# Altium PCB KANE_403.PcbDoc
Units mil, origin at the board's own origin, x right, y up, seen from the top; angles counter-clockwise.
Board outline 2490 x 5325 mil, 4 copper layers (Top Copper, Signal Layer 1, Signal Layer 2, Bottom Copper), stack 61.811 mil thick; 12 components, 57 nets, 142 pads, 0 vias.
Unrouted connection lines stored in the file: 78.
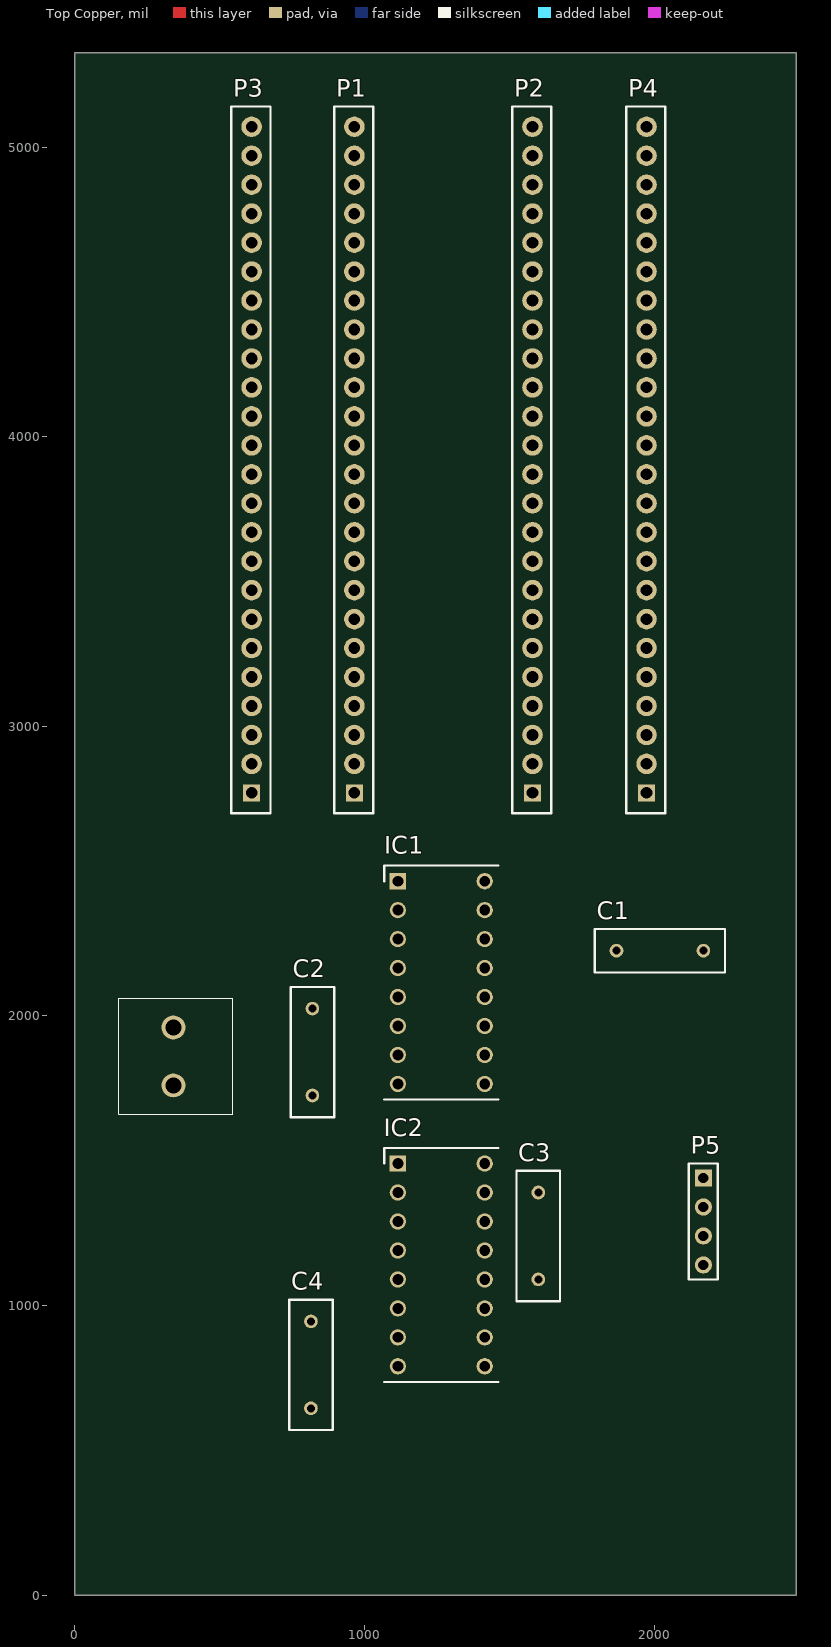
[diagram p0: Top Copper view]
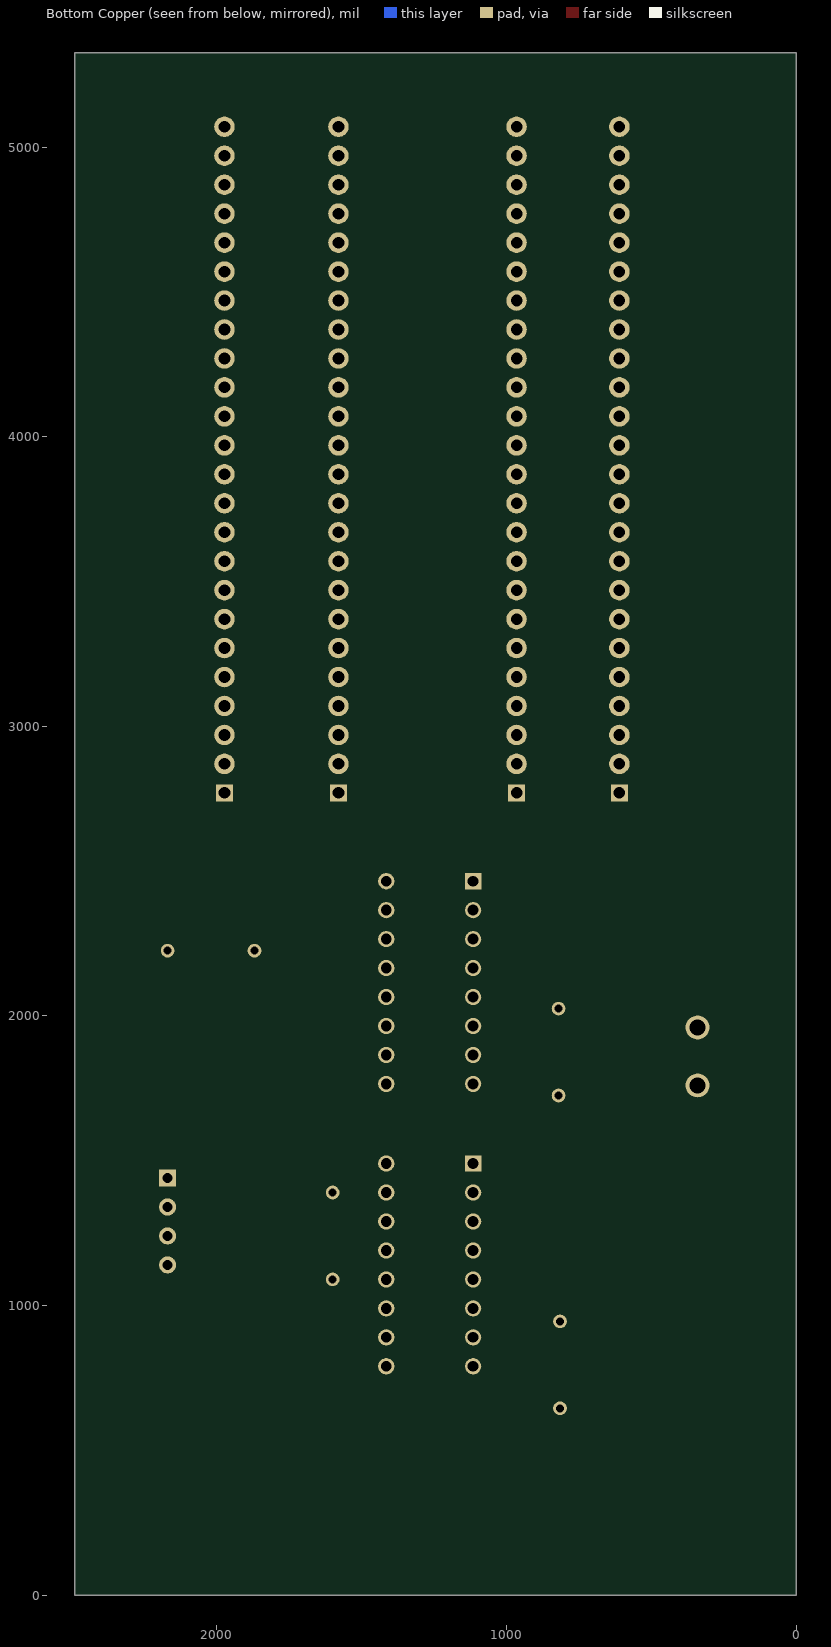
[diagram p1: Bottom Copper view, seen from below]

## Layer stack, top to bottom
Top Mask: solder mask 0.5906, Solder Resist, Dk 3.8
Top Copper: signal copper 1.378
Dielectric 1: prepreg 7.874, 7628, Dk 4.6
Signal Layer 1: signal copper 0.689
Core: core 41.9291, FR-4, Dk 4.5
Signal Layer 2: signal copper 0.689
Dielectric 2: prepreg 7.874, 7628, Dk 4.6
Bottom Copper: signal copper 1.378
Bottom Mask: solder mask 0.5906, Solder Resist, Dk 3.8

## Board outline
0,0 0,5325 2490,5325 2490,0

## Design rules (kind name [scope] priority, off if disabled: settings)
BoardOutlineClearance [All] p1: gap=7.87 ignorepadtopadclearanceinfootprint=FALSE except(15.75: Arc-SplitBarrior Arc-SplitContinuation Track-SplitBarrior Track-SplitContinuation SMDPad-SplitBarrior SMDPad-SplitContinuation THPad-SplitBarrior THPad-SplitContinuation Via-SplitBarrior Via-SplitContinuation Fill-SplitBarrior Fill-SplitContinuation Poly-SplitBarrior Poly-SplitContinuation Region-SplitBarrior Region-SplitContinuation Text-SplitBarrior Text-SplitContinuation)
Clearance "Clearance Bottom Layer" [OnLayer('Bottom Layer')] p1: gap=8 ignorepadtopadclearanceinfootprint=TRUE except(10: Arc-Text Track-Text SMDPad-Text THPad-Text Via-Text Fill-Text Poly-Text Region-Text Text-Text)
Clearance "Clearance Top Layer" [OnLayer('Top Layer')] p2: gap=8 ignorepadtopadclearanceinfootprint=TRUE except(10: Arc-Text Track-Text SMDPad-Text THPad-Text Via-Text Fill-Text Poly-Text Region-Text Text-Text)
Clearance [All] p3: gap=7.87 ignorepadtopadclearanceinfootprint=FALSE except(3.5: Arc-Arc Arc-Track Arc-SMDPad Track-Track Track-SMDPad SMDPad-SMDPad; 5: Arc-Via Track-Via SMDPad-Via THPad-Via Via-Via; 10: Arc-Text Track-Text SMDPad-Text THPad-Text Via-Text Fill-Text Poly-Text Region-Text Text-Text)
HoleSize [All] p1: absolutevalues=TRUE maxlimit=248.03 minlimit=7.87 maxpercent=80.000 minpercent=20.000
MinimumAnnularRing [All] p1: minimumring=3
MinimumSolderMaskSliver [All] p1: minsoldermaskwidth=3.94
PolygonConnect PolygonConnect_1 [All] p1: thpad.connectstyle=Relief thpad.reliefconductorwidth=20 thpad.reliefentries=4 thpad.polygonreliefangle="90 Angle" thpad.airgapwidth=10 smdpad.connectstyle=Relief smdpad.reliefconductorwidth=20 smdpad.reliefentries=4 smdpad.polygonreliefangle="90 Angle" smdpad.airgapwidth=10 via.connectstyle=Direct via.reliefconductorwidth=20 via.reliefentries=4 via.polygonreliefangle="90 Angle" via.airgapwidth=10
RoutingCorners [All] p1: cornerstyle=Round minsetback=100 maxsetback=100
RoutingVias [All] p1: holewidth=19.68 width=39.37 viastyle="Through Hole" minholewidth=7.87 minwidth=17.72 maxholewidth=39.37 maxwidth=78.74
SilkToSilkClearance [All] p1: silktosilkclearance=3.94
SilkToSolderMaskClearance [IsPad] p1: minsilkscreentomaskgap=3.94 clearancetoexposedcopper=TRUE
SolderMaskExpansion [All] p1: expansion=4 istentingtop=FALSE
Width [All] p1: maxlimit=100 minlimit=3.5 preferedwidth=15
25 further rules are at their usual default settings.

## Components (designator, comment, footprint, x,y, rotation, side; value= is the part's Value field where it differs from the comment)
C1 "Cap" RAD-0.3 2020,2225 r180 top value=100pF
C2 "Cap" RAD-0.3 820,1875 r90 top value=100pF
C3 "Cap" RAD-0.3 1600,1240 r90 top value=100pF
C4 "Cap" RAD-0.3 815,795 r90 top value=100pF
IC1 "1-2199298-4" DIPS762W70P254L2032H510Q16N 1115,2465 r0 top
IC2 "1-2199298-4" DIPS762W70P254L2032H510Q16N 1115,1490 r0 top
J1 "39544-3002" 395443002 340,1960 r270 top
P1 "Teensy41_Left_Header" HDR1X24 965,2770 r90 top
P2 "Teensy41_Right_Header" HDR1X24 1580,2770 r90 top
P3 "22-28-4242" 22-28-4242 610,2770 r90 top
P4 "22-28-4242" 22-28-4242 1973.7,2770 r90 top
P5 "Header 4" HDR1X4 2170,1440 r270 top

## Footprints (in the part's own frame and the unit in brackets; to place one, negate y for a bottom-side part, rotate by r counter-clockwise, add the part's x,y. Pads: shape width x height; smd on the part's side, far side on the other; paste and mask are expansions set on the pad)
22-28-4242 [mm] "Connector; Male Pin Header; 24 Position; Molex 22-28-4242"
  rect 1.5x1.5 hole 1.02: 1(0,0)
  round 1.8 hole 1.02: 2(2.54,0) 3(5.08,0) 4(7.62,0) 5(10.16,0) 6(12.7,0) 7(15.24,0) 8(17.78,0) 9(20.32,0) 10(22.86,0) 11(25.4,0) 12(27.94,0) 13(30.48,0) 14(33.02,0) 15(35.56,0) 16(38.1,0) 17(40.64,0) 18(43.18,0) 19(45.72,0) 20(48.26,0) 21(50.8,0) 22(53.34,0) 23(55.88,0) 24(58.42,0)
  silkscreen extent -1.78,-1.65 60.2,1.78, body extent -1.27,-1.22 59.69,1.27, height 9.78
395443002 [mm] "Molex 395443002"
  round 2.1 hole 1.4: 1(0,0) 2(5.08,0)
  silkscreen extent -2.54,-4.8 7.62,5.2, body extent -2.54,-4.8 7.62,5.2, height 14.5
DIPS762W70P254L2032H510Q16N [mm]
  rect 1.425x1.425 hole 0.95: 1(0,0)
  round 1.425 hole 0.95: 2(0,-2.54) 3(0,-5.08) 4(0,-7.62) 5(0,-10.16) 6(0,-12.7) 7(0,-15.24) 8(0,-17.78) 9(7.62,-17.78) 10(7.62,-15.24) 11(7.62,-12.7) 12(7.62,-10.16) 13(7.62,-7.62) 14(7.62,-5.08) 15(7.62,-2.54) 16(7.62,0)
  silkscreen extent -1.19,-19.15 8.81,1.37, body extent -1.19,-19.05 8.81,1.27, height 2.26
HDR1X4 [mm] "Connector; Header; 4 Position"
  rect 1.5x1.5 hole 0.9: 1(0,0)
  round 1.5 hole 0.9: 2(2.54,0) 3(5.08,0) 4(7.62,0)
  silkscreen extent -1.27,-1.27 8.89,1.27
HDR1X24 [mm] "Connector; Header; 24 Position"
  rect 1.5x1.5 hole 1.02: 1(0,0)
  round 1.8 hole 1.02: 2(2.54,0) 3(5.08,0) 4(7.62,0) 5(10.16,0) 6(12.7,0) 7(15.24,0) 8(17.78,0) 9(20.32,0) 10(22.86,0) 11(25.4,0) 12(27.94,0) 13(30.48,0) 14(33.02,0) 15(35.56,0) 16(38.1,0) 17(40.64,0) 18(43.18,0) 19(45.72,0) 20(48.26,0) 21(50.8,0) 22(53.34,0) 23(55.88,0) 24(58.42,0)
  silkscreen extent -1.78,-1.65 60.2,1.78, body extent -1.27,-1.25 59.69,1.25, height 8.26
RAD-0.3 [mm] "Radial Cap, Thru-Hole; 2 Leads; 0.3 in Pin Spacing"
  round 1.2 hole 0.7: 1(-3.81,0) 2(3.81,0)
  silkscreen extent -5.71,-1.91 5.71,1.91

## Part data
C1 C2 C3 C4: "Capacitor", LatestRevisionDate=17-Jul-2002, LatestRevisionNote="Re-released for DXP Platform.", PackageDescription="Radial Cap, Thru-Hole; 2 Leads; 0.3 in Pin Spacing", PackageReference=RAD-0.3, Published=8-Jun-2000, Publisher="Altium Limited"
IC1 IC2: "Integrated Circuit", Manufacturer_Name="TE Connectivity", Datasheet Link=https://www.te.com/commerce/DocumentDelivery/DDEController?Action=showdoc&DocId=Customer+Drawing%7F2199298%7FA%7Fpdf%7FEnglish%7FENG_CD_2199298_A_baseFilename.pdf%7F1-2199298-4, Height=5.1mm, Manufacturer_Part_Number=1-2199298-4
J1: "Connector", Manufacturer_Name=Molex, Datasheet Link=https://componentsearchengine.com/Datasheets/2/39544-3002.pdf, Height=14.4mm, Manufacturer_Part_Number=39544-3002
P1 P3 P4: "929974-01-24-RK Header, 24-Pin. Teensy 4.1 compatible.", Supplier Part Number 1=517-929974-01-24-RK, LatestRevisionDate=17-Jul-2002, LatestRevisionNote="Re-released for DXP Platform.", Publisher="Altium Limited", Supplier 1=Mouser
P2: "929974-01-24-RK_1 Header, 24-Pin. Teensy 4.1 compatible.", Supplier Part Number 1=517-929974-01-24-RK, LatestRevisionDate=17-Jul-2002, LatestRevisionNote="Re-released for DXP Platform.", Publisher="Altium Limited", Supplier 1=Mouser
P5: "Header, 4-Pin", LatestRevisionDate=17-Jul-2002, LatestRevisionNote="Re-released for DXP Platform.", Publisher="Altium Limited"

## Nets (pads, with @x,y where several pads share a name; then routed paths per layer and width w, separated by ;. In a path a pad name is that pad's centre, name@x,y a point inside that pad or via, vN(x,y) a via of type N, cw(c..) or ccw(c..) an arc to the next point about the centre after c; other vN are vias at no path point)
3.3V: P5.1
GND: C1.1 C2.1 C3.1 C4.1 IC1.6 IC1.8 IC2.6 IC2.8 P5.4
NetC1_2: C1.2 C3.2 IC1.15 IC2.15 J1.2
NetC2_2: C2.2 C4.2 IC1.7 IC2.7 J1.1
NetIC1_1: IC1.1 IC2.1 P2.14 P4.14
NetIC1_2: IC1.2 IC2.2 P1.12 P3.12
NetIC1_3: IC1.3 IC2.3 P1.11 P3.11
NetIC1_4: IC1.4 P1.13 P3.13
NetIC1_5: IC1.5 IC2.4
NetIC1_9: IC1.9 P5.2
NetIC1_11: IC1.11 IC1.12
NetIC1_16: IC1.16 IC2.16 P2.24 P4.24
NetIC2_9: IC2.9 P5.3
NetIC2_11: IC2.11 IC2.12
NetP1_1: P1.1 P3.1
NetP1_2: P1.2 P3.2
NetP1_3: P1.3 P3.3
NetP1_4: P1.4 P3.4
NetP1_5: P1.5 P3.5
NetP1_6: P1.6 P3.6
NetP1_7: P1.7 P3.7
NetP1_8: P1.8 P3.8
NetP1_9: P1.9 P3.9
NetP1_10: P1.10 P3.10
NetP1_14: P1.14 P3.14
NetP1_15: P1.15 P3.15
NetP1_16: P1.16 P3.16
NetP1_17: P1.17 P3.17
NetP1_18: P1.18 P3.18
NetP1_19: P1.19 P3.19
NetP1_20: P1.20 P3.20
NetP1_21: P1.21 P3.21
NetP1_22: P1.22 P3.22
NetP1_23: P1.23 P3.23
NetP1_24: P1.24 P3.24
NetP2_1: P2.1 P4.1
NetP2_2: P2.2 P4.2
NetP2_3: P2.3 P4.3
NetP2_4: P2.4 P4.4
NetP2_5: P2.5 P4.5
NetP2_6: P2.6 P4.6
NetP2_7: P2.7 P4.7
NetP2_8: P2.8 P4.8
NetP2_9: P2.9 P4.9
NetP2_10: P2.10 P4.10
NetP2_11: P2.11 P4.11
NetP2_12: P2.12 P4.12
NetP2_13: P2.13 P4.13
NetP2_15: P2.15 P4.15
NetP2_16: P2.16 P4.16
NetP2_17: P2.17 P4.17
NetP2_18: P2.18 P4.18
NetP2_19: P2.19 P4.19
NetP2_20: P2.20 P4.20
NetP2_21: P2.21 P4.21
NetP2_22: P2.22 P4.22
NetP2_23: P2.23 P4.23
pads on no net: IC1.10 IC1.13 IC1.14 IC2.5 IC2.10 IC2.13 IC2.14

## Silkscreen, mask and mechanical layers (free items; w line width, h text height)
alignment:
  lines w10: 610,5070 1003.7,5070 ; 965,5070 1265,5070 ; 1115,1490 1265,1490 ; 1115,2465 1265,2465 ; 1265,120 1265,3185 1265,5070 ; 1973.7,5070 1580,5070 1265,5070